# EAGLE board UAVpcb (EAGLE 9.6.2)
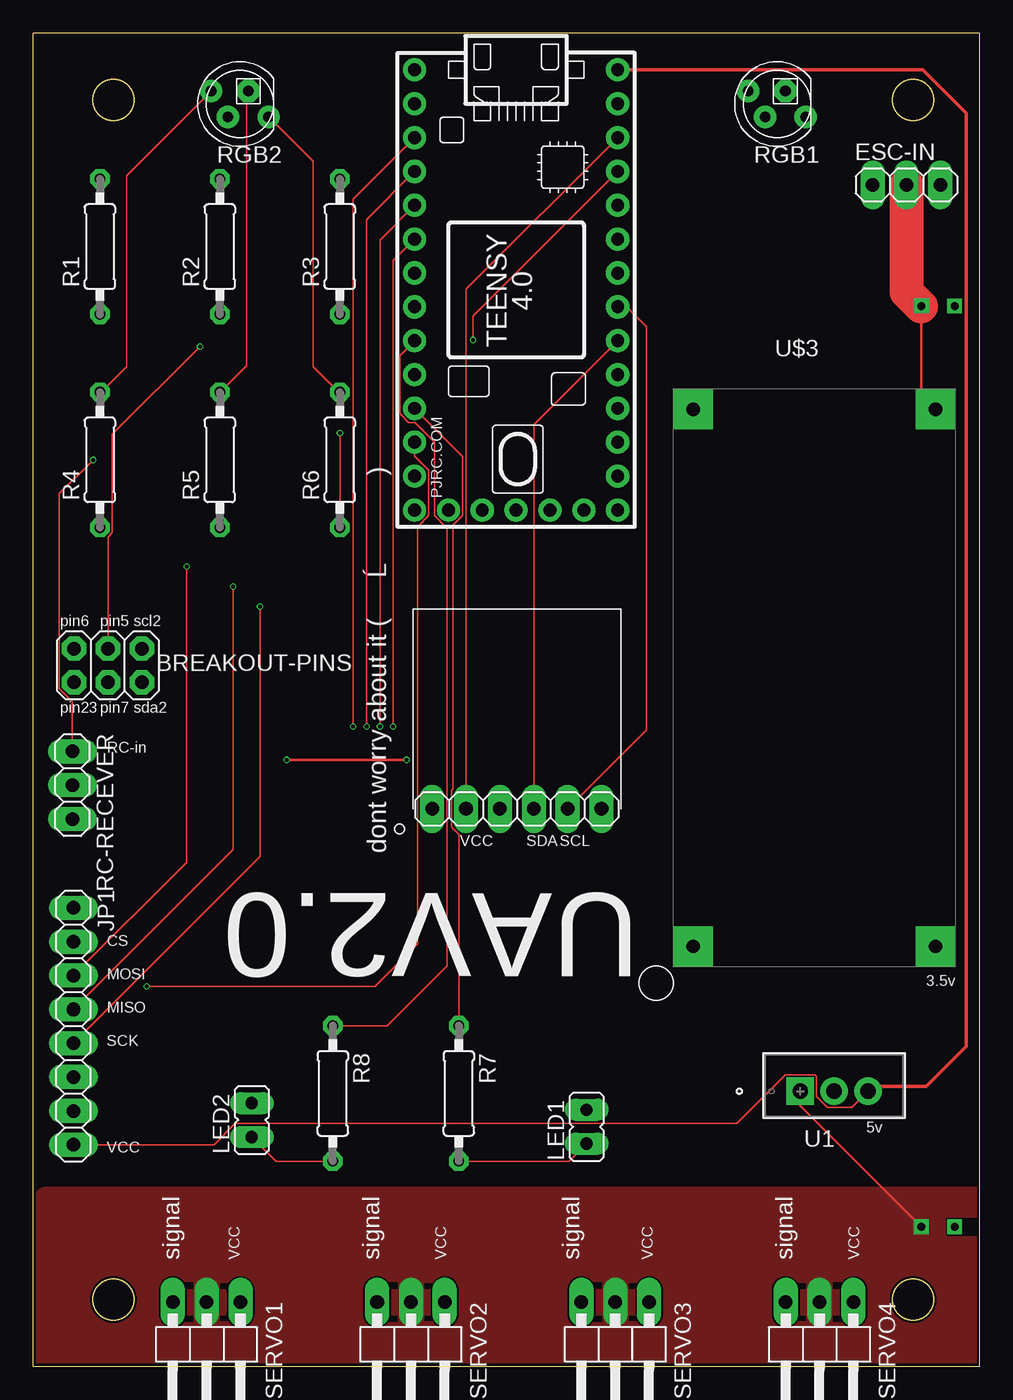
[diagram p0: board, top side]
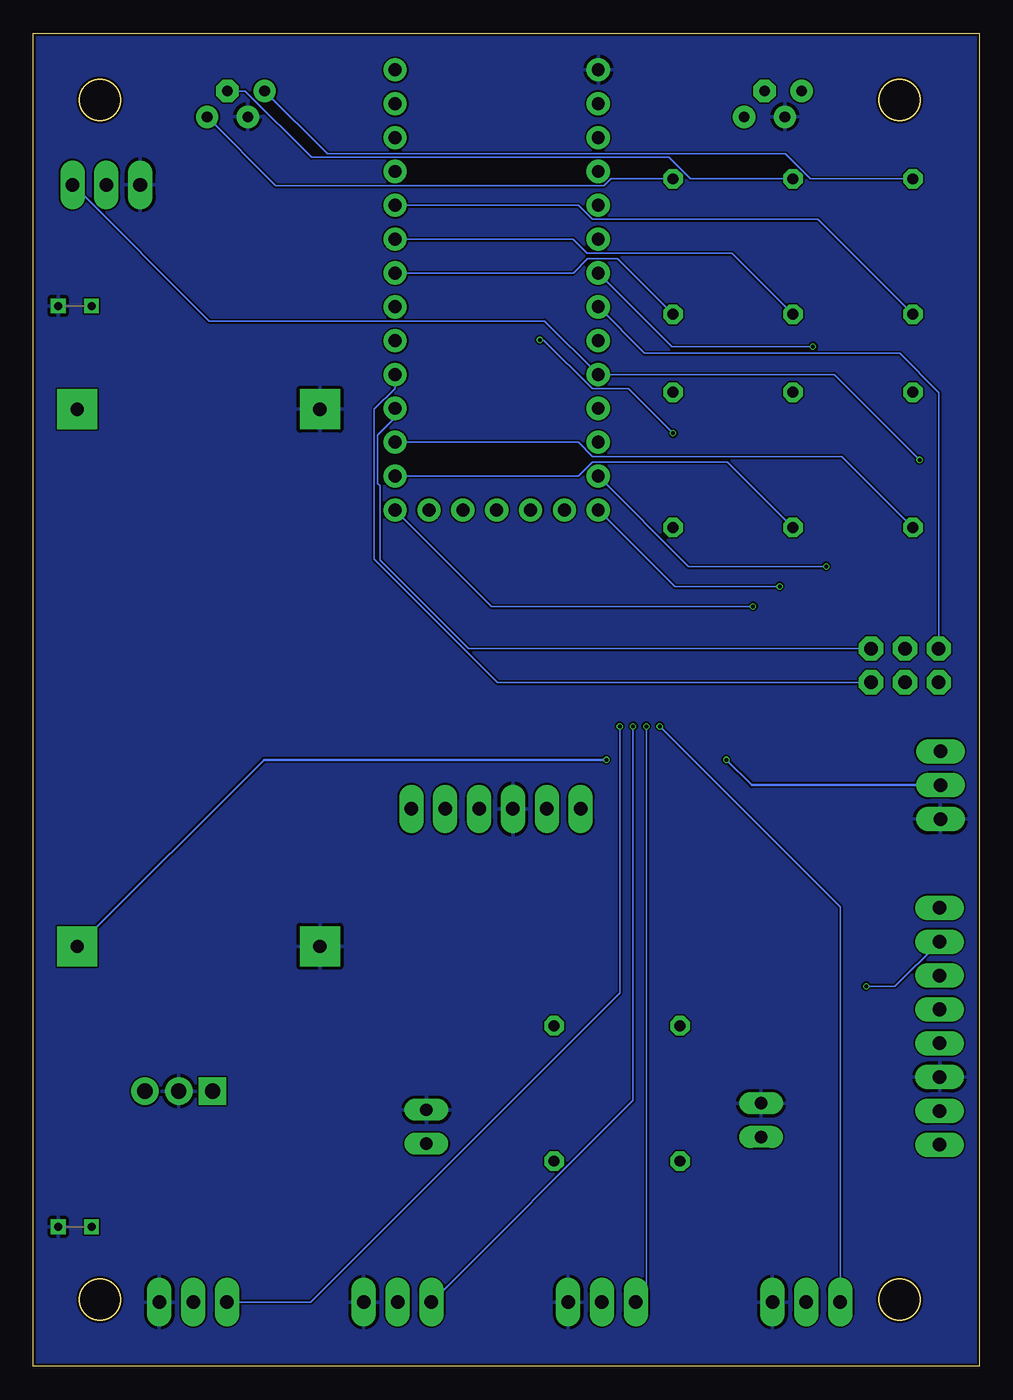
[diagram p1: board, bottom side, seen from below]

Size 71 x 100 mm. Coordinates in mm from the lower left corner, seen from the top.
Outline: 0,0 71,0 71,100 0,100 0,0
Outline: circle at 6,5 radius 1.55
Outline: circle at 66,5 radius 1.55
Outline: circle at 66,95 radius 1.55
Outline: circle at 6,95 radius 1.55
Copper layers (1*16): Top 0.035mm / dielectric 1.6mm / Bottom 0.035mm
Design rules "JLBPCB": minimum track width 5mil, minimum drill 0.3mm, track to track 5mil, track to pad 5mil, pad to pad 5mil, via to via 5mil, smd to smd 5mil, copper to edge 0.2mm, drill to drill 6mil, minimum pad ring 10mil, minimum via ring 3mil, stop-mask expansion 4mil, vias tented up to drill 0mil, thermal gap 10mil

## Footprints (pad centres in the part's own frame; a part is rotated, then mirrored left to right if it is on the bottom)
2X03 = drill 1.016 octagon: 1 -2.54,-1.27; 2 -2.54,1.27; 3 0,-1.27; 4 0,1.27; 5 2.54,-1.27; 6 2.54,1.27
1X03 = drill 1.016 long: 1 -2.54,0; 2 0,0; 3 2.54,0
1X08 = drill 1.016 long: 1 -8.89,0; 2 -6.35,0; 3 -3.81,0; 4 -1.27,0; 5 1.27,0; 6 3.81,0; 7 6.35,0; 8 8.89,0
JP1 = drill 0.914 long: 1 0,-1.27; 2 0,1.27
0207/10 = drill 0.813 octagon: 1 -5.08,0; 2 5.08,0
LED5MMRGB = drill 0.8 pad 1.676: 1 -2.159,0.968; 3 0.889,0.968; 4 2.159,-0.968 | drill 0.8 pad 1.676 octagon: 2 -0.635,-0.968
1X03/90 = drill 1.016 long: 1 -2.54,-3.81; 2 0,-3.81; 3 2.54,-3.81
TO-220_STM = drill 1.143 pad 1.651 square: 1 0,0 | drill 1.143 pad 1.651: 2 2.54,0; 3 5.08,0
TEENSY_4.0 = drill 0.965: 0/RX -13.97,-7.62; 1/TX -11.43,-7.62; 2 -8.89,-7.62; 3/CANTX -6.35,-7.62; 3V3_LN 16.51,-2.54; 3V3_LO -11.43,7.62; 4/CANRX -3.81,-7.62; 5 -1.27,-7.62; 6 1.27,-7.62; 7 3.81,-7.62; 8 6.35,-7.62; 9/CS 8.89,-7.62; 10/CS 11.43,-7.62; 11/MOSI 13.97,-7.62; 12/MISO 16.51,-7.62; 13/SCK 16.51,7.62; 14/A0 13.97,7.62; 15/A1 11.43,7.62; 16/A2 8.89,7.62; 17/A3 6.35,7.62; 18/A4/SDA 3.81,7.62; 19/A5/SCL 1.27,7.62; 20/A6 -1.27,7.62; 21/A7 -3.81,7.62; 22/A8 -6.35,7.62; 23/A9 -8.89,7.62; GND -16.51,-7.62; GND2 -13.97,7.62; GND3 16.51,0; ON/OFF 16.51,5.08; PROG 16.51,2.54; VBAT\ 16.51,-5.08; VIN -16.51,7.62
1X06 = drill 1.016 long: 1 -6.35,0; 2 -3.81,0; 3 -1.27,0; 4 1.27,0; 5 3.81,0; 6 6.35,0
LM2596 = drill 1 pad 3 square: P$1 1.5,1.5; P$2 19.7,1.5; P$3 19.7,41.8; P$4 1.5,41.8
AT35 = drill 0.6 pad 1.016 square: IN+ 0,2.5; IN- 0,0; VO+ 69.1,2.5; VO- 69.1,0

## Placement (x,y rotation side)
BREAKOUT-PINS  [2X03]  5.6,52.57 180 top
ESC-IN  [1X03]  65.52,88.63 0 top
JP1  [1X08]  3,25.5 270 top
LED1  LED2P  [JP1]  41.51,17.96 0 top
LED2  LED2P  [JP1]  16.39,18.46 0 top
R1  220  [0207/10]  5,84 90 top
R2  220  [0207/10]  14,84 90 top
R3  220  [0207/10]  23,84 90 top
R4  220  [0207/10]  5,68 90 top
R5  220  [0207/10]  14,68 90 top
R6  220  [0207/10]  23,68 90 top
R7  220  [0207/10]  31.93,20.46 270 top
R8  220  [0207/10]  22.47,20.46 270 top
RC-RECEVER  [1X03]  2.93,43.59 270 top
RGB1  5MMRGBLED  [LED5MMRGB]  55.8,94.7 180 top
RGB2  5MMRGBLED  [LED5MMRGB]  15.5,94.7 180 top
SERVO1  [1X03/90]  13,1 180 top
SERVO2  [1X03/90]  28.33,1 180 top
SERVO3  [1X03/90]  43.67,1 180 top
SERVO4  [1X03/90]  59,1 180 top
U1  L7805CV  [TO-220_STM]  57.55,20.63 0 top
U$1  TEENSY_4.0  [TEENSY_4.0]  36.23,80.75 270 top
U$2  BMI088  [1X06]  36.28,41.81 0 top
U$3  LM2596  [LM2596]  48,30 0 top
U$4  AT35  [AT35]  69.13,79.55 270 bottom

## Library data of the parts
BREAKOUT-PINS ESC-IN JP1 RC-RECEVER SERVO1-SERVO4 = pinhead
LED1 LED2 = OPTO
R1-R8 = rcl; SPICEPREFIX: R
RGB1 RGB2 = adafruit
U1 = L7805CV; BUILT_BY: EMA_UL_Team; MANUFACTURER_PART_NUMBER: L7805CV; SOURCELIBRARY: Updates_to_database_2020-11-10; VENDOR: STMicroelectronics
U$1 = TEENSY 4.0
U$2 = BMI088
U$3 = LM2596
U$4 = at35

## Nets
3.3V: U$1.3V3_LO U$2.2
3.5V: RC-RECEVER.2 U$3.P$2
5.5V: ESC-IN.2 U$3.P$3 U$4.IN+
5V: JP1.8 U1.3 U$1.VIN
6V: SERVO1.2 SERVO2.2 SERVO3.2 SERVO4.2 U1.1 U$4.VO+
BLUE1: R3.1 U$1.20/A6
BLUE2: R6.1 U$1.23/A9
CD: JP1.1
CS: JP1.2 U$1.10/CS
GND: ESC-IN.1 JP1.6 LED1.2 LED2.2 RC-RECEVER.3 RGB1.3 RGB2.3 SERVO1.1 SERVO2.1 SERVO3.1 SERVO4.1 U1.2 U$1.GND U$2.3 U$3.P$1 U$3.P$4 U$4.IN- U$4.VO-
GREEN1: R2.1 U$1.21/A7
GREEN2: R5.1 U$1.14/A0
LED1: R7.1 U$1.9/CS
LED2: R8.1 U$1.7
MISO: JP1.4 U$1.12/MISO
MOSI: JP1.3 U$1.11/MOSI
N$1: LED1.1 R7.2
N$2: LED2.1 R8.2
N$3: R6.2 RGB2.1
N$4: R5.2 RGB2.2
N$5: R4.2 RGB2.4
N$6: R3.2 RGB1.1
N$7: R2.2 RGB1.2
N$8: R1.2 RGB1.4
N$16: JP1.7
RC-SIGNAL: ESC-IN.3 RC-RECEVER.1 U$1.8
RED1: R1.1 U$1.22/A8
RED2: R4.1 U$1.15/A1
SCK: JP1.5 U$1.13/SCK
SCL: U$1.19/A5/SCL U$2.5
SCL2: BREAKOUT-PINS.1 U$1.16/A2
SDA: U$1.18/A4/SDA U$2.4
SDA2: BREAKOUT-PINS.2 U$1.17/A3
SERVO1SIGNAL: SERVO1.3 U$1.1/TX
SERVO2SIGNAL: SERVO2.3 U$1.2
SERVO3SIGNAL: SERVO3.3 U$1.3/CANTX
SERVO4SIGNAL: SERVO4.3 U$1.4/CANRX
TEENSY5: BREAKOUT-PINS.3 U$1.5
TEENSY6: BREAKOUT-PINS.5 U$1.6
TEENSY7: BREAKOUT-PINS.4
TEENSY23: BREAKOUT-PINS.6

## Tracks (layer width: path | path; a pad name or v marks a point on that pad's centre or on a via)
3.3V
  Top 0.127: U$2.2 32.47,80.8 U$1.3V3_LO
3.5V  (via drill 0.3)
  Top 0.2: v19,45.5 v28,45.5
  Bottom 0.2: RC-RECEVER.2 17.09,43.59 v19,45.5 | v28,45.5 53.7,45.5 U$3.P$2
5.5V
  Top 0.2: U$4.IN+ 66.63,79.5 66.63,72.87 U$3.P$3
  Top 2.54: ESC-IN.2 65.52,80.61 66.63,79.5
5V
  Top 0.127: JP1.8 13.55,16.61 15.15,18.21 52.8,18.21 56.44,21.85 58.66,21.85 58.77,21.74 58.77,20.23 59.59,19.41 61.41,19.41 U1.3
  Top 0.254: U1.3 63,21 67,21 70,24 70,94 66.74,97.26 U$1.VIN
6V
  Top 0.2: U$4.VO+ 57.55,19.53 U1.1
  pour Top: 1,12.5 72,12.5 72,-0.5 -0.5,-0.5 -0.5,11
BLUE1
  Bottom 0.127: U$1.20/A6 30.48,82.02 29.42,83.08 27.16,83.08 R3.1
BLUE2  (via drill 0.3)
  Top 0.127: R6.1 v23,70 | v33,77 33,78.79 U$1.23/A9
  Bottom 0.127: v23,70 26.34,73.34 29.05,73.34 32.71,77 v33,77
CS  (via drill 0.3)
  Top 0.127: U$1.10/CS 28.61,68.28 29.67,67.22 29.67,63.8 28.82,62.96 28.82,31.68 25.65,28.5 v8.5,28.5
  Bottom 0.127: JP1.2 6.35,28.5 v8.5,28.5
GND
  pour Bottom: -1,-1 74,-1 74,101 -1,101 -2,102 -2,0
GREEN1
  Bottom 0.127: U$1.21/A7 30.51,84.56 29.45,83.5 18.58,83.5 R2.1
GREEN2
  Bottom 0.127: U$1.14/A0 30.11,66.78 29.05,67.84 18.92,67.84 R5.1
LED1
  Top 0.127: U$1.9/CS 32.21,68.26 32.21,63.8 31.5,63.09 31.5,43.32 31.36,43.18 31.36,40.44 31.93,39.88 R7.1
LED2
  Top 0.127: U$1.7 27.5,75.83 27.5,71.5 27.55,71.45 27.55,71.42 28.17,70.8 28.63,70.8 30.09,69.34 30.09,63.8 31.04,62.86 31.04,30.04 26.54,25.54 R8.1
MISO  (via drill 0.3)
  Top 0.127: v15,58.5 15,38.77 JP1.4
  Bottom 0.127: U$1.12/MISO 22.87,58.5 v15,58.5
MOSI  (via drill 0.3)
  Top 0.127: v11.5,60 11.5,37.81 JP1.3
  Bottom 0.127: U$1.11/MOSI 21.83,60 v11.5,60
N$1
  Top 0.127: R7.2 40.2,15.38 LED1.1
N$2
  Top 0.127: R8.2 18.2,15.38 LED2.1
N$3
  Top 0.127: R6.2 22.92,73.08 21,75 21,90.39 RGB2.1
N$4
  Top 0.127: R5.2 16,75.08 16,95.53 RGB2.2
N$5
  Top 0.127: R4.2 5.08,73.08 7,75 7,89.33 RGB2.4
N$6
  Bottom 0.127: R3.2 27.67,89.08 28.17,88.58 52.81,88.58 RGB1.1
N$7
  Bottom 0.127: R2.2 21.7,89.08 23.32,90.7 50.13,90.7 55.1,95.67 RGB1.2
N$8
  Bottom 0.127: RGB1.4 48.93,90.95 14.57,90.95 12.7,89.08 R1.2
RC-SIGNAL  (via drill 0.3)
  Top 0.127: RC-RECEVER.1 2.93,49.87 1.96,50.84 1.96,65.45 v4.5,68
  Bottom 0.127: ESC-IN.3 68,88.63 57.79,78.42 32.63,78.42 U$1.8 10.9,74.4 v4.5,68
RED1
  Bottom 0.127: U$1.22/A8 30.11,87.1 29.05,86.04 12.12,86.04 R1.1
RED2
  Bottom 0.127: U$1.15/A1 30.11,69.32 29.05,68.26 10.34,68.26 R4.1
SCK  (via drill 0.3)
  Top 0.127: v17,57 17,38.23 JP1.5
  Bottom 0.127: U$1.13/SCK 36.61,57 v17,57
SCL
  Top 0.127: U$2.5 46,47.72 46,78 44.52,79.48 U$1.19/A5/SCL
SCL2
  Bottom 0.127: U$1.16/A2 43.85,71.18 45.16,69.86 45.16,66.24 45,66.07 45,60.5 38.34,53.84 BREAKOUT-PINS.1
SDA
  Top 0.127: U$2.4 37.55,70.64 U$1.18/A4/SDA
SDA2
  Bottom 0.127: U$1.17/A3 43.85,73.36 45.42,71.79 45.42,60.56 36.16,51.3 BREAKOUT-PINS.2
SERVO1SIGNAL  (via drill 0.3)
  Top 0.127: U$1.1/TX 24,87.57 v24,48
  Bottom 0.127: v24,48 10.46,34.46 SERVO1.3
SERVO2SIGNAL  (via drill 0.3)
  Top 0.127: U$1.2 25,86.03 v25,48
  Bottom 0.127: v25,48 25,5.6 SERVO2.3
SERVO3SIGNAL  (via drill 0.3)
  Top 0.127: U$1.3/CANTX 26,84.49 v26,48
  Bottom 0.127: v26,48 26,19.94 SERVO3.3
SERVO4SIGNAL  (via drill 0.3)
  Top 0.127: U$1.4/CANRX 27,82.95 v27,48
  Bottom 0.127: v27,48 27,28 50.19,4.81 SERVO4.3
TEENSY5  (via drill 0.3)
  Top 0.127: BREAKOUT-PINS.3 5.6,62.22 5.92,62.54 5.92,69.92 v12.5,76.5
  Bottom 0.127: U$1.5 23.09,76.5 v12.5,76.5
TEENSY6
  Bottom 0.127: U$1.6 25.13,76 6,76 3.06,73.06 BREAKOUT-PINS.5

## Text on the board
tNames: pin6 | pin5 | scl2 | pin23 | pin7 | sda2 | RC-in | VCC | SDA | SCL | dont worry about it (▀̿Ĺ̯▀̿ ̿) | UAV2.0 | CS | MOSI | 3.5v | MISO | SCK | 5v | VCC | signal | VCC | signal | VCC | signal | VCC | signal | VCC